# Altium PCB TMC2160.PcbDoc
Units mm, origin at the board's own origin, x right, y up, seen from the top; angles counter-clockwise.
Board outline 65 x 40 mm, 4 copper layers (Top Layer, Layer 1, Layer 2, Bottom Layer), stack 1.52 mm thick; 52 components, 55 nets, 207 pads, 154 vias.
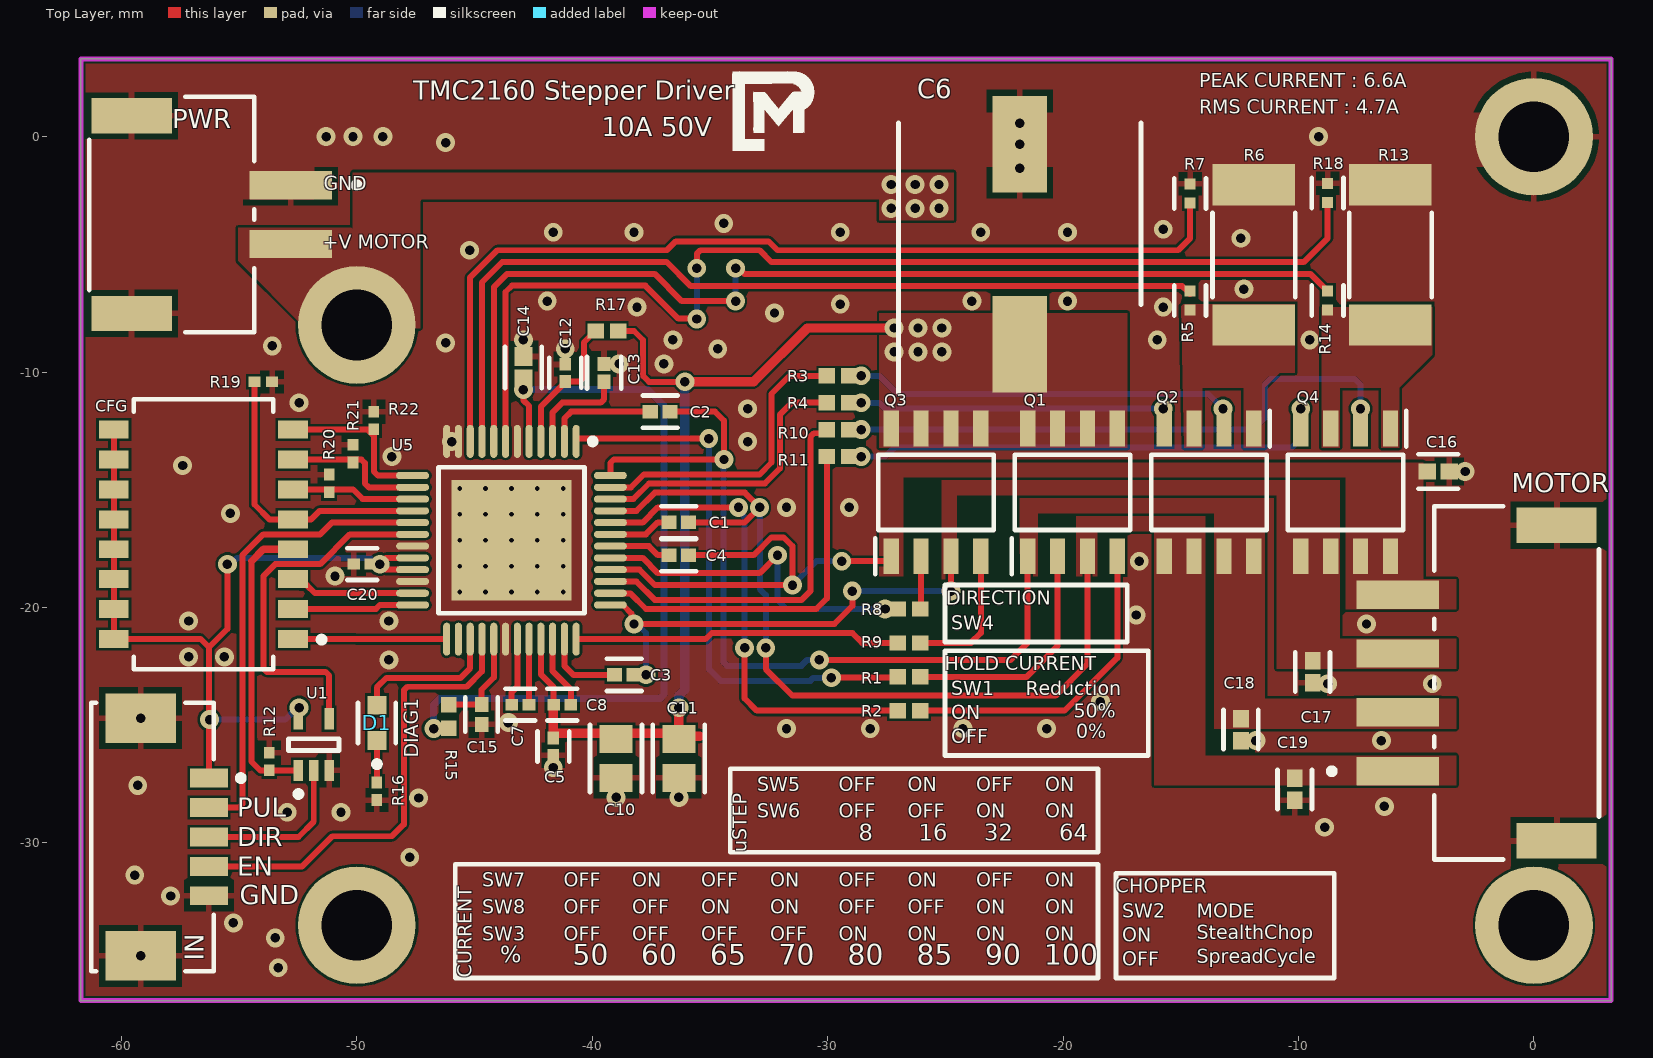
[diagram p0: Top Layer view]
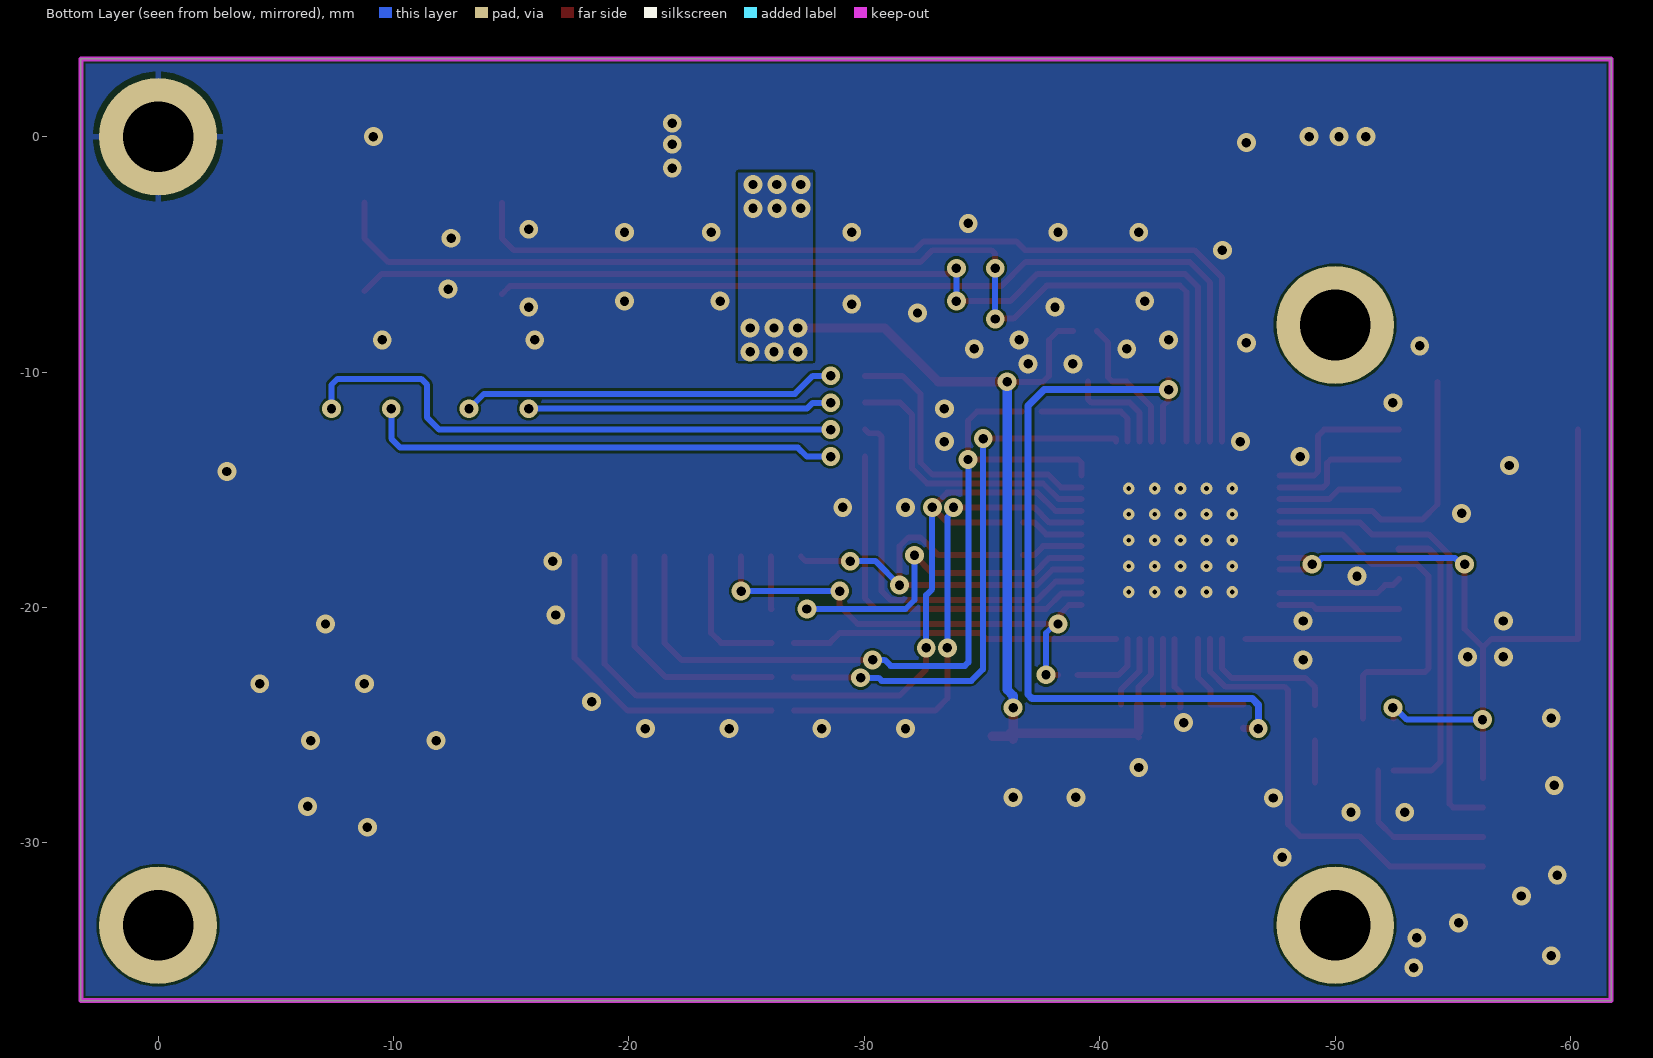
[diagram p1: Bottom Layer view, seen from below]
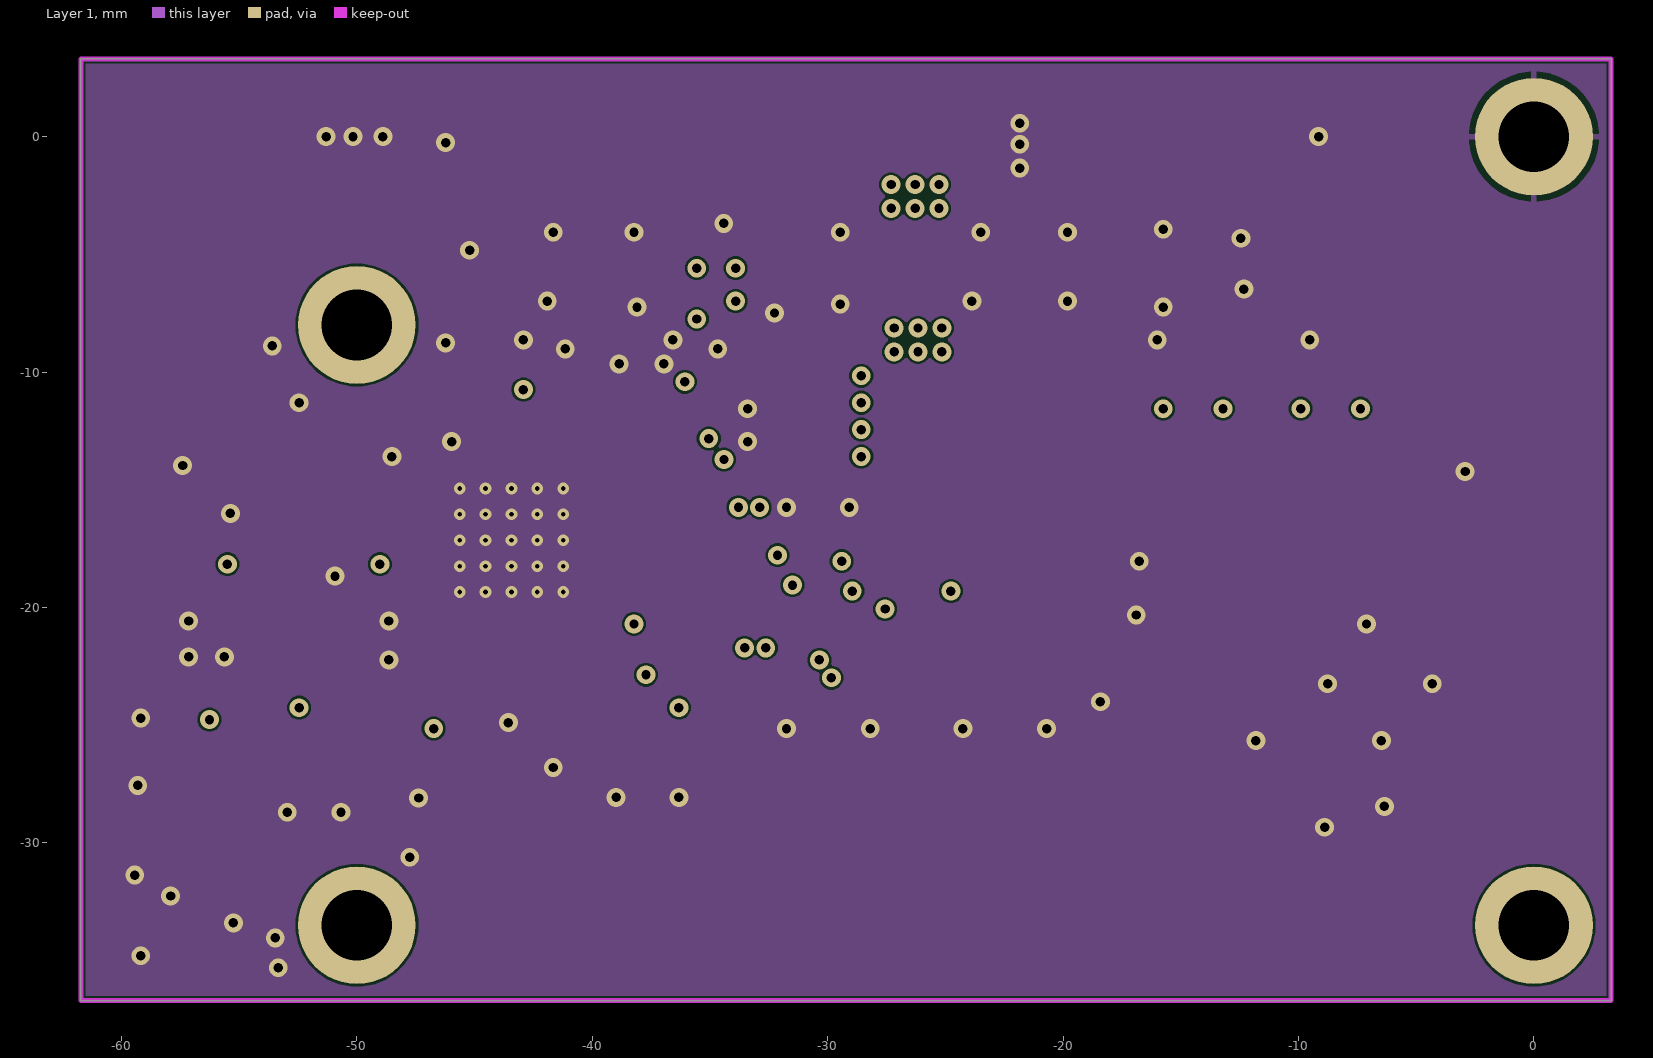
[diagram p2: Layer 1]
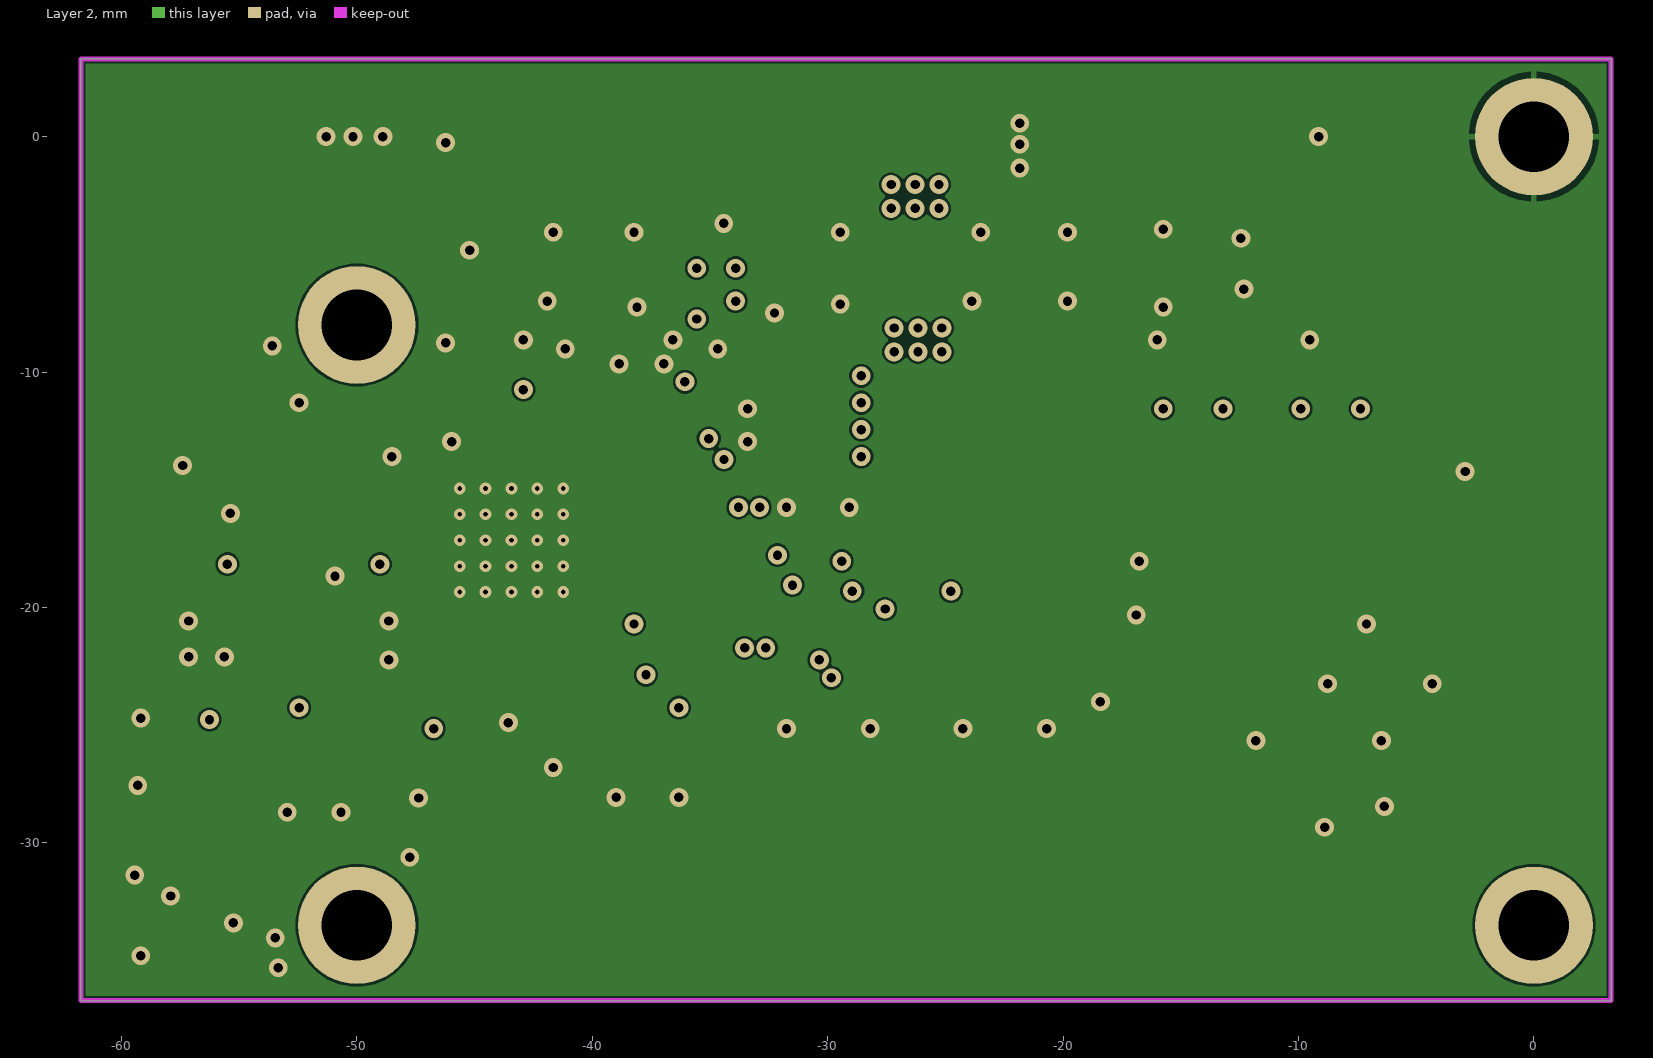
[diagram p3: Layer 2]
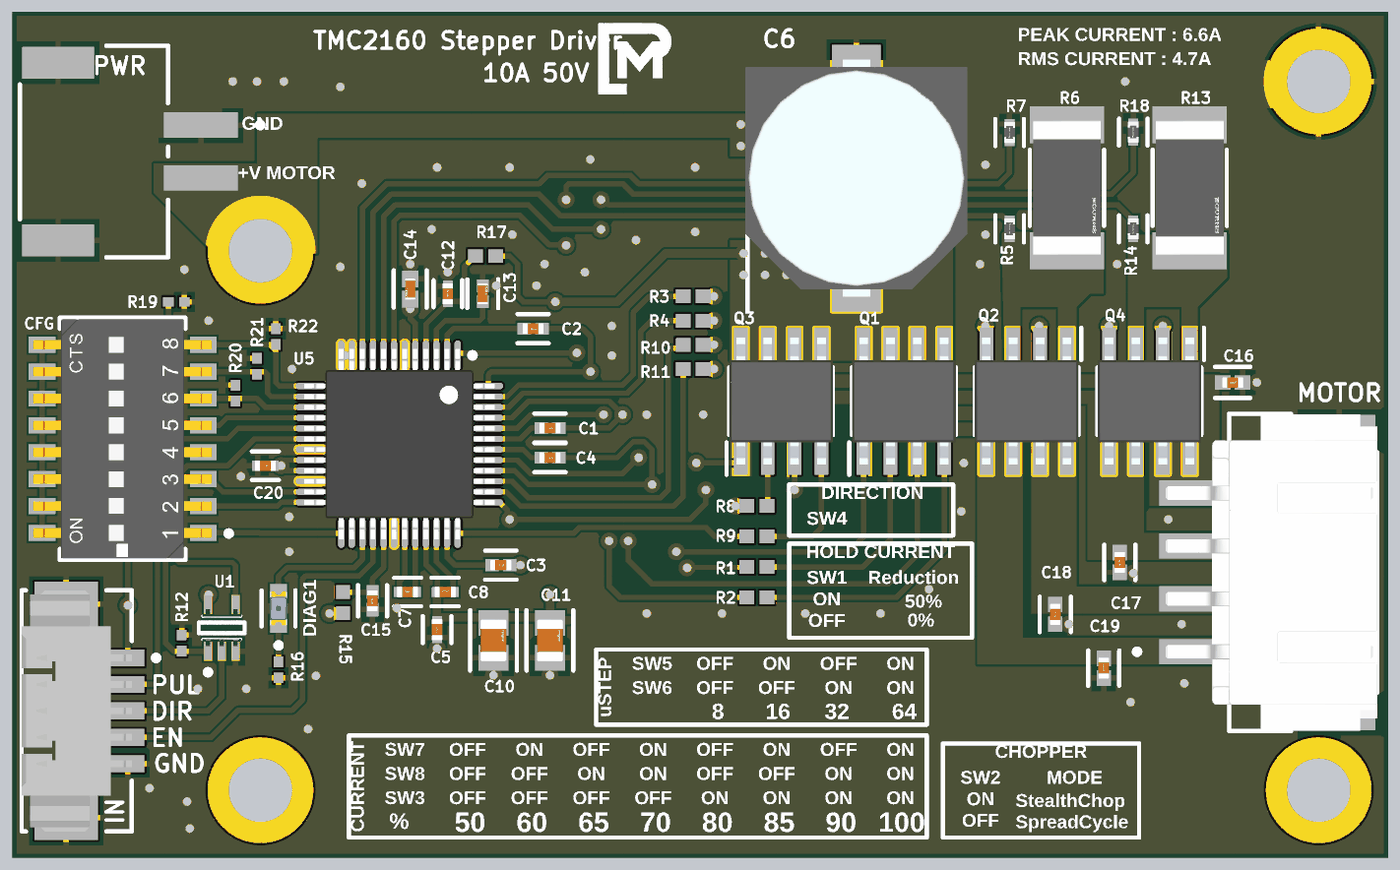
[diagram p4: 3D render of the assembled board from above, using the file's embedded part models]

## Layer stack, top to bottom
Top Solder: solder mask 0.01, Solder Resist, Dk 3.5
Top Layer: signal copper 0.035
Dielectric 2: prepreg 0.09, PP-006, Dk 4.1
Layer 1: signal copper 0.035
Dielectric 1: dielectric 1.2, FR-4, Dk 4.8
Layer 2: signal copper 0.035
Dielectric 3: prepreg 0.09, PP-006, Dk 4.1
Bottom Layer: signal copper 0.035
Bottom Solder: solder mask 0.01, Solder Resist, Dk 3.5

## Board outline
-61.722,-36.698 -61.722,3.302 3.278,3.302 3.278,-36.698

## Design rules (kind name [scope] priority, off if disabled: settings)
Clearance [All] p1: gap=0.1 ignorepadtopadclearanceinfootprint=FALSE
PolygonConnect PolygonConnect_1 [All vs IsNamedPolygon('P_BMA1') Or IsNamedPolygon('P_BMA2') Or IsNamedPolygon('P_BMB1') Or IsNamedPolygon('P_BMB2') Or IsNamedPolygon('P_GND_POWER') Or IsNamedPolygon('P_RES1') Or IsNamedPolygon('P_RES2') Or IsNamedPolygon('P_VM_TOP') Or IsNamedPolygon('P_VM_TOP_1') Or IsNamedPolygon('P_VM_BOTTOM')] p1: connectstyle=Direct reliefconductorwidth=0.254 reliefentries=4 polygonreliefangle="90 Angle" airgapwidth=0.254
PolygonConnect PolygonConnect_3 [(HasFootprint('FP-CRA2512-IPC_A') OR HasFootprint('TSQFP-48'))] p2: connectstyle=Direct reliefconductorwidth=0.254 reliefentries=4 polygonreliefangle="90 Angle" airgapwidth=0.254
PolygonConnect PolygonConnect_2 [isVia] p3: connectstyle=Direct reliefconductorwidth=0.254 reliefentries=4 polygonreliefangle="90 Angle" airgapwidth=0.254
PolygonConnect [All] p4: connectstyle=Relief reliefconductorwidth=0.254 reliefentries=4 polygonreliefangle="90 Angle" airgapwidth=0.254
RoutingVias [All] p1: holewidth=0.5 width=1 viastyle="Through Hole" minholewidth=0.4 minwidth=0.8 maxholewidth=0.5 maxwidth=1
SilkToSilkClearance [All] p1: silktosilkclearance=0.1
SolderMaskExpansion [All] p1: expansion=0.102 istentingtop=FALSE
Width [All] p1: maxlimit=2 minlimit=0.2 preferedwidth=0.3
29 further rules are at their usual default settings.

## Components (designator, comment, footprint, x,y, rotation, side; value= is the part's Value field where it differs from the comment)
C1 "C1005X5R1V474K050BC" FP-C1005-050-0_05-IPC_B -36.322,-16.383 r180 top value=470nF
C2 "C1005X5R1V474K050BC" FP-C1005-050-0_05-IPC_B -37.12,-11.684 r180 top value=470nF
C3 "C1005X5R1V474K050BC" FP-C1005-050-0_05-IPC_B -38.644,-22.86 r180 top value=470nF
C4 "C1005X5R1V474K050BC" FP-C1005-050-0_05-IPC_B -36.322,-17.78 r180 top value=470nF
C5 "C1005X7R1H104K050BB" FP-C1005-050-0_05-IPC_C -41.656,-25.908 r270 top value=100nF
C6 "VZH221M1HTR-1010L" CAPAE1030X1050N -21.844,-4.572 r90 top value=220u
C7 "C1005X7R1H223K050BB" FP-C1005-050-0_05-IPC_C -43.053,-24.13 r0 top value=22nF
C8 "C1005X7R1H104K050BB" FP-C1005-050-0_05-IPC_C -41.275,-24.13 r0 top value=100nF
C10 "GRM21BR61H475KE51L" FP-GRM21B-0_15-IPC_B -38.989,-26.416 r90 top value=4.7uF
C11 "GRM21BR61H475KE51L" FP-GRM21B-0_15-IPC_B -36.322,-26.416 r90 top value=4.7uF
C12 "C1005X7R1H104K050BB" FP-C1005-050-0_05-IPC_C -41.148,-10.033 r270 top value=100nF
C13 "C1005X5R1V225K050BC" FP-C1005-050-0_15-IPC_C -39.497,-10.033 r90 top value=2.2uF
C14 "C1005X5R1V225K050BC" FP-C1005-050-0_15-IPC_A -42.926,-9.81 r270 top value=2.2uF
C15 "C1005X5R1V474K050BC" FP-C1005-050-0_05-IPC_B -44.704,-24.547 r90 top value=470nF
C16 "C1005X7R1H102K050BA" FP-C1005-050-0_05-IPC_A -4.064,-14.224 r180 top value=1nF
C17 "C1005X7R1H102K050BA" FP-C1005-050-0_05-IPC_A -9.398,-22.733 r90 top value=1nF
C18 "C1005X7R1H102K050BA" FP-C1005-050-0_05-IPC_A -12.446,-25.187 r90 top value=1nF
C19 "C1005X7R1H102K050BA" FP-C1005-050-0_05-IPC_A -10.16,-27.727 r90 top value=1nF
C20 "C1005X7R1H104K050BB" FP-C1005-050-0_05-IPC_C -49.77,-18.161 r0 top value=100nF
CFG "218-8LPST" FP-218-8LPST-MFG -56.515,-16.891 r180 top
D1 "LTST-C191TBKT" FP-LTST-C191TBKT-MFG -49.149,-24.904 r90 top value=Blue
IN "53261-0571" MOLX-52361-0571-5_V -56.282,-29.748 r270 top
MOTOR "SHOU HAN 2.54-4P WT" A2501WF-04A -0.734,-23.206 r90 top
PWR "SHOU HAN 2.54-2P WT" A2501WF-02A -56.188,-3.311 r270 top
Q1 "CSD88537ND" SOIC127P600X175-8N -19.599,-15.113 r90 top
Q2 "CSD88537ND" SOIC127P600X175-8N -13.802,-15.113 r270 top
Q3 "CSD88537ND" SOIC127P600X175-8N -25.4,-15.113 r90 top
Q4 "CSD88537ND" SOIC127P600X175-8N -8.001,-15.113 r270 top
R1 "RC0402FR-0710RL" RESC1005X40X25ML05T10 -26.543,-22.945 r180 top value=10
R2 "RC0402FR-0710RL" RESC1005X40X25ML05T10 -26.543,-24.384 r0 top value=10
R3 "RC0402FR-0710RL" RESC1005X40X25ML05T10 -29.558,-10.16 r180 top value=10
R4 "RC0402FR-0710RL" RESC1005X40X25ML05T10 -29.558,-11.303 r0 top value=10
R5 "ERJ-2RKF47R0X" FP-ERJ2RK-IPC_C -14.605,-6.964 r270 top value=47R
R6 "CRA2512-FZ-R050ELF" FP-CRA2512-IPC_A -11.897,-5.026 r270 top value=0R050
R7 "ERJ-2RKF47R0X" FP-ERJ2RK-IPC_C -14.605,-2.413 r90 top value=47R
R8 "RC0402FR-0710RL" RESC1005X40X25ML05T10 -26.543,-20.066 r180 top value=10
R9 "RC0402FR-0710RL" RESC1005X40X25ML05T10 -26.543,-21.505 r0 top value=10
R10 "RC0402FR-0710RL" RESC1005X40X25ML05T10 -29.558,-12.446 r180 top value=10
R11 "RC0402FR-0710RL" RESC1005X40X25ML05T10 -29.558,-13.589 r0 top value=10
R12 "RC0402FR-0710KL" RESC1005X40X25LL05T10 -53.721,-26.543 r270 top value=10K
R13 "CRA2512-FZ-R050ELF" FP-CRA2512-IPC_A -6.096,-5.026 r270 top
R14 "ERJ-2RKF47R0X" FP-ERJ2RK-IPC_C -8.763,-6.964 r270 top value=47R
R15 "ERJ-2GEJ2R2X" RESC1005X40X25ML05T05 -46.101,-24.63 r270 top
R16 "RC0402FR-07330RL" RESC1005X40X25LL05T10 -49.149,-27.807 r90 top value=330
R17 "RC0402FR-0710RL" RESC1005X40X25ML05T10 -39.37,-8.255 r180 top value=10
R18 "ERJ-2RKF47R0X" FP-ERJ2RK-IPC_C -8.763,-2.392 r90 top value=47R
R19 "RC0402FR-0710KL" RESC1005X40X25LL05T10 -53.975,-10.414 r180 top value=10K
R20 "RC0402FR-0710KL" RESC1005X40X25LL05T10 -51.181,-14.732 r270 top value=10K
R21 "RC0402FR-0710KL" RESC1005X40X25LL05T10 -50.165,-13.462 r270 top value=10K
R22 "RC0402FR-0710KL" RESC1005X40X25LL05T10 -49.276,-12.059 r270 top value=10K
U1 "SN74LVC1G86DCKR" FP-DCK0005A-MFG -51.831,-25.824 r90 top
U5 "TMC2160" TSQFP-48 -43.434,-17.145 r270 top

## Footprints (in the part's own frame and the unit in brackets; to place one, negate y for a bottom-side part, rotate by r counter-clockwise, add the part's x,y. Pads: shape width x height; smd on the part's side, far side on the other; paste and mask are expansions set on the pad)
A2501WF-02A [mm]
  rect 1.2x3.5 smd paste+0 mask+0: 1(-1.25,3.375) 2(1.25,3.375)
  rect 1.5x3.4 smd paste+0 mask+0: 3(-4.2,-3.375) 4(4.2,-3.375)
  silkscreen extent -5,-5.18 5,6.3
A2501WF-04A [mm]
  rect 1.2x3.5 smd paste+0 mask+0: 1(-3.75,5.05) 2(-1.25,5.05) 3(1.25,5.05) 4(3.75,5.05)
  rect 1.5x3.4 smd paste+0 mask+0: 5(-6.7,-1.7) 6(6.7,-1.7)
  silkscreen extent -7.5,-3.5 7.5,7.97, body extent -7.95,-3.8 7.95,7.4, height 0.25
CAPAE1030X1050N [mm]
  rect 4.1x2.3 smd: 1(-4.25,0) 2(4.25,0)
  silkscreen extent -6.3,-5.15 5.15,5.15, body extent -5.6,-5.25 5.6,5.25, height 10.5
FP-218-8LPST-MFG [mm]
  rect 1.27x0.76 smd paste+0 mask+0: 1(-3.81,4.445) 2(-3.81,3.175) 3(-3.81,1.905) 4(-3.81,0.635) 5(-3.81,-0.635) 6(-3.81,-1.905) 7(-3.81,-3.175) 8(-3.81,-4.445) 9(3.81,-4.445) 10(3.81,-3.175) 11(3.81,-1.905) 12(3.81,-0.635) 13(3.81,0.635) 14(3.81,1.905) 15(3.81,3.175) 16(3.81,4.445)
  silkscreen extent -5.14,-5.73 2.97,5.73, body extent -4.54,-5.83 4.54,5.83, height 0.25
FP-C1005-050-0_05-IPC_A [mm]
  rect 0.739x0.672 smd paste+0 mask+0: 1(-0.467,0) 2(0.467,0)
  silkscreen extent -0.84,-0.74 0.84,0.74, body extent -0.5,-0.25 0.5,0.25, height 0.55
FP-C1005-050-0_05-IPC_B [mm]
  rect 0.639x0.572 smd paste+0 mask+0: 1(-0.417,0) 2(0.417,0)
  silkscreen extent -0.74,-0.69 0.74,0.69, body extent -0.89,-0.44 0.89,0.44, height 0.25
FP-C1005-050-0_05-IPC_C [mm]
  rect 0.539x0.472 smd paste+0 mask+0: 1(-0.367,0) 2(0.367,0)
  silkscreen extent -0.64,-0.67 0.64,0.67, body extent -0.74,-0.38 0.74,0.38, height 0.25
FP-C1005-050-0_15-IPC_A [mm]
  rect 0.805x0.76 smd paste+0 mask+0: 1(-0.477,0) 2(0.477,0)
  silkscreen extent -0.88,-0.78 0.88,0.78, body extent -1.08,-0.58 1.08,0.58, height 0.25
FP-C1005-050-0_15-IPC_C [mm]
  rect 0.605x0.56 smd paste+0 mask+0: 1(-0.377,0) 2(0.377,0)
  silkscreen extent -0.68,-0.72 0.68,0.72, body extent -0.78,-0.43 0.78,0.43, height 0.25
FP-CRA2512-IPC_A [mm]
  rect 1.756x3.506 smd paste+0 mask+0: 1(-2.975,0) 2(2.975,0)
  silkscreen extent -1.8,-1.75 1.8,1.75, body extent -4.35,-2.25 4.35,2.25, height 0.25
FP-DCK0005A-MFG [mm]
  rect 0.9x0.4 smd paste-1000 mask+0: 1(-1.1,0.65) 2(-1.1,0) 3(-1.1,-0.65) 4(1.1,-0.65) 5(1.1,0.65)
  silkscreen extent -2.22,-1.07 0.25,1.07, body extent -1.65,-1.33 1.65,1.33, height 0.25
FP-ERJ2RK-IPC_C [mm]
  rect 0.468x0.472 smd paste+0 mask+0: 1(-0.402,0) 2(0.402,0)
  silkscreen extent -0.64,-0.67 0.64,0.67, body extent -0.74,-0.38 0.74,0.38, height 0.25
FP-GRM21B-0_15-IPC_B [mm]
  rect 1.206x1.408 smd paste+0 mask+0: 1(-0.826,0) 2(0.826,0)
  silkscreen extent -1.43,-1.1 1.43,1.1, body extent -1.68,-0.95 1.68,0.95, height 0.25
FP-LTST-C191TBKT-MFG [mm]
  rect 0.8x0.8 smd paste+0 mask+0: 1(-0.75,0) 2(0.75,0)
  silkscreen extent -1.87,-0.8 0.85,0.8, body extent -1.25,-0.55 1.25,0.55, height 0.25
MOLX-52361-0571-5_V [mm] "SMD, 5-Leads, Body 11.4x5.2mm, Pitch 1.25mm"
  rect 0.8x1.6 smd: 1(-2.5,0) 2(-1.25,0) 3(0,0) 4(1.25,0) 5(2.5,0)
  rect 2.1x3 smd: MP1(-5.05,-2.9) MP2(5.05,-2.9)
  silkscreen extent -5.7,-5 5.7,1.48, body extent -5.7,-5 5.7,0.2, height 3.4
RESC1005X40X25LL05T10 [mm] "Chip Resistor, 2-Leads, Body 1.00x0.50mm, IPC High Density"
  rect 0.5x0.45 smd: 1(-0.375,0) 2(0.375,0)
  body extent -0.53,-0.27 0.53,0.28, height 0.4
RESC1005X40X25ML05T05 [mm] "Chip Resistor, 2-Leads, Body 1.00x0.50mm, IPC Low Density"
  rect 0.65x0.65 smd: 1(-0.5,0) 2(0.5,0)
  body extent -0.53,-0.27 0.53,0.28, height 0.4
RESC1005X40X25ML05T10 [mm] "Chip Resistor, 2-Leads, Body 1.00x0.50mm, IPC Low Density"
  rect 0.7x0.65 smd: 1(-0.475,0) 2(0.475,0)
  body extent -0.53,-0.27 0.53,0.28, height 0.4
SOIC127P600X175-8N [mm]
  rect 1.525x0.65 smd: 1(-2.712,1.905) 2(-2.712,0.635) 3(-2.712,-0.635) 4(-2.712,-1.905) 5(2.712,-1.905) 6(2.712,-0.635) 7(2.712,0.635) 8(2.712,1.905)
  silkscreen extent -3.47,-2.45 1.6,2.58, body extent -3,-2.45 3,2.45, height 1.75
TSQFP-48 [mm] "TSQFP, 48-Leads, Body 7.00x7.00mm, Pitch 0.50mm, Thermal Pad 5.10x5.10mm, IPC Medium Density"
  oval 1.4x0.3 smd: 1(-4.2,2.75) 2(-4.2,2.25) 3(-4.2,1.75) 4(-4.2,1.25) 5(-4.2,0.75) 6(-4.2,0.25) 7(-4.2,-0.25) 8(-4.2,-0.75) 9(-4.2,-1.25) 10(-4.2,-1.75) 11(-4.2,-2.25) 12(-4.2,-2.75) 25(4.2,-2.75) 26(4.2,-2.25) 27(4.2,-1.75) 28(4.2,-1.25) 29(4.2,-0.75) 30(4.2,-0.25) 31(4.2,0.25) 32(4.2,0.75) 33(4.2,1.25) 34(4.2,1.75) 35(4.2,2.25) 36(4.2,2.75)
  oval 0.3x1.4 smd: 13(-2.75,-4.2) 14(-2.25,-4.2) 15(-1.75,-4.2) 16(-1.25,-4.2) 17(-0.75,-4.2) 18(-0.25,-4.2) 19(0.25,-4.2) 20(0.75,-4.2) 21(1.25,-4.2) 22(1.75,-4.2) 23(2.25,-4.2) 24(2.75,-4.2) 37(2.75,4.2) 38(2.25,4.2) 39(1.75,4.2) 40(1.25,4.2) 41(0.75,4.2) 42(0.25,4.2) 43(-0.25,4.2) 44(-0.75,4.2) 45(-1.25,4.2) 46(-1.75,4.2) 47(-2.25,4.2) 48(-2.75,4.2)
  rect 5.1x5.1 smd: 49(0,0)
  silkscreen extent -4.32,-3.1 3.1,3.57, body extent -4.5,-4.5 4.5,4.5, height 1.2

## Part data
C1 C2 C3 C4 C15: library part CMP-08246-003870-1, "Multilayer Ceramic Capacitors 470nF ±10% 35V X5R SMD 0402", Case Code (Imperial)=0402, Case Code (Metric)=1005, Dielectric=X5R, Dielectric Material=Ceramic, Max Operating Temperature=85°C, Min Operating Temperature=-55°C, Package Quantity=10000, Tolerance=10%, Voltage Rating=35V, Case/Package=0402, Height=0.5mm, Lead Free="Lead Free", Length=0.039inch, Mount="Surface Mount", Packaging="Tape and Reel", RoHS Compliant=Yes, Series=C, Termination=SMD/SMT, Thickness=0.022inch, Voltage Rating (DC)=35V, Weight=2.3E-05oz, Width=0.02inch
C5 C8 C12 C20: library part CMP-2000-05393-2, "Multilayer Ceramic Capacitors 100nF ±10% 50V X7R SMD 0402", Case Code (Imperial)=0402, Case Code (Metric)=1005, Dielectric=X7R, Dielectric Material=Ceramic, Max Operating Temperature=125°C, Min Operating Temperature=-55°C, Package Quantity=1, Tolerance=10%, Voltage=50V, Case/Package=0402, Construction=Flat, Depth=0.5mm, Height=0.5mm, Lead Free="Lead Free", Length=1mm, Mount="Surface Mount", Packaging="Tape and Reel", Radiation Hardening=No, REACH SVHC="No SVHC", Resistor Type=Ceramic, RoHS Compliant=Yes, Series=C, Termination=SMD/SMT, Thickness=0.022inch, Voltage Rating=50V, Voltage Rating (DC)=50V, Weight=2.3E-05oz, Width=0.02inch
C6: "Capacitor Polarised", Manufacturer_Name=Lelon, Datasheet Link=https://www.mouser.co.uk/datasheet/2/231/151002387394-1222329.pdf, Height=10.5mm, Manufacturer_Part_Number=VZH221M1HTR-1010L
C7: library part CMP-08246-004483-1, "Multilayer Ceramic Capacitors 22nF ±10% 50V X7R SMD 0402", Case Code (Imperial)=0402, Case Code (Metric)=1005, Dielectric=X7R, Dielectric Material=Ceramic, Max Operating Temperature=125°C, Min Operating Temperature=-55°C, Package Quantity=1, Tolerance=10%, Voltage Rating=50V, Case/Package=0402, Construction=Flat, Depth=0.5mm, Height=0.5mm, Lead Free="Lead Free", Length=1mm, Mount="Surface Mount", Number of Pins=2, Packaging="Tape and Reel", Radiation Hardening=No, REACH SVHC="No SVHC", Resistor Type=Ceramic, RoHS Compliant=Yes, Series=C, Termination=SMD/SMT, Thickness=0.022inch, Voltage Rating (DC)=50V, Weight=2.3E-05oz, Width=0.02inch
C10 C11: library part CMP-06035-059131-1, "Chip Multilayer Ceramic Capacitors for General Purpose, 0805, 4.7uF, X5R, 15%, 10%, 50V", Case Code (Imperial)=0805, Case Code (Metric)=2012, Dielectric=X5R, Max Operating Temperature=85°C, Min Operating Temperature=-55°C, Tolerance=10%, Voltage Rating=50V, Case/Package=0805, Depth=1.25mm, Height=1.25mm, Lead Free="Lead Free", Length=2mm, Material=Ceramic, Mount="Surface Mount", Packaging="Tape and Reel", REACH SVHC="No SVHC", Thickness=0.055inch, Voltage Rating (DC)=50V, Width=0.049inch
C13 C14: library part CMP-08246-007153-1, "CAP CER 2.2UF 35V X5R 0402", Case Code (Imperial)=0402, Case Code (Metric)=1005, Dielectric=X5R, Dielectric Material=Ceramic, Max Operating Temperature=85°C, Min Operating Temperature=-55°C, Package Quantity=1, Tolerance=10%, Voltage Rating=35V, Case/Package=0402, Depth=0.5mm, Height=0.5mm, Lead Free="Lead Free", Length=1mm, Mount="Surface Mount", Packaging="Tape and Reel", REACH SVHC="No SVHC", Resistor Type=Ceramic, RoHS Compliant=Yes, Series=C, Termination=SMD/SMT, Thickness=0.022inch, Voltage Rating (DC)=35V, Weight=2.3E-05oz, Width=0.5mm
C16 C17 C18 C19: library part CMP-08246-005438-1, "Multilayer Ceramic Capacitors 1nF ±10% 50V X7R SMD 0402", Case Code (Imperial)=0402, Case Code (Metric)=1005, Dielectric=X7R, Dielectric Material=Ceramic, Max Operating Temperature=125°C, Min Operating Temperature=-55°C, Package Quantity=1, Tolerance=10%, Voltage=50V, Case/Package=0402, Construction=Flat, Depth=0.5mm, Height=0.5mm, Lead Free="Lead Free", Length=1mm, Mount="Surface Mount", Packaging="Tape and Reel", Radiation Hardening=No, REACH SVHC="No SVHC", Resistor Type=Ceramic, RoHS Compliant=Yes, Series=C, Termination=SMD/SMT, Thickness=0.022inch, Voltage Rating=50V, Voltage Rating (DC)=50V, Weight=2.3E-05oz, Width=0.02inch
CFG: library part CMP-07018-000007-1, "SWITCH SLIDE DIP SPST 25MA 24V", Contact Resistance=100mR, Current Rating=25mA, Max Operating Temperature=85°C, Max Voltage Rating (DC)=24V, Min Operating Temperature=-55°C, Package Quantity=40, Actuator Type="Slide (Standard)", Contact Material=Copper, Contact Plating=Gold, Depth=8.44mm, Electrical Life=1000Cycles, Height=2.65mm, Lead Free="Lead Free", Length=0.446inch, Max Current Rating=25mA, Mount="Surface Mount", Number of Positions=8, Orientation=Straight, Packaging=Rail/Tube, Pitch=0.05inch, Radiation Hardening=No, RoHS Compliant=Yes, Series=218, Terminal Pitch=1.27mm, Termination="Gull Wing", Throw Configuration=SPST, Voltage Rating (DC)=24V, Washable=Yes
D1: library part CMP-22017-000008-1, "LED BLUE CLEAR CHIP SMD", Case Code (Imperial)=0603, Case Code (Metric)=1608, Color=Blue, Forward Current=20mA, Forward Voltage=3.8V, Lens Color=Colorless, Max Operating Temperature=80°C, Max Power Dissipation=75mW, Min Operating Temperature=-20°C, Package Quantity=1, Power Dissipation=76mW, Reverse Voltage=5V, Case/Package=0603, Depth=1.6mm, Dominant Wavelength=475nm, Height=0.55mm, Illumination Color=Blue, Lead Free="Lead Free", Length=0.8mm, Lens Style=Diffused, Lens Transparency=Clear, Luminous Intensity=180mcd, Mount="Surface Mount", Number of Elements=1, Number of LEDs=1, Number of Pins=2, Packaging="Tape and Reel", Radiation Hardening=No, Test Current=20mA, Viewing Angle=130°, Wavelength=468nm, Width=0.8mm
IN: library part CMP-2000-05249-1, "Male Header, Pitch 1.25 mm, 1 x 5 Position, Height 3.4 mm, RoHS, Tape and Reel", Current Rating=1A, Manufacturer=Molex, Voltage Rating=125V, Brand=Molex, Contact Material=PhosphorBronze, Contact Plating=Tin, Datasheet URL=http://datasheet.octopart.com/532610571-Molex-datasheet-8343080.pdf, Datasheet Version="Rev. D, 04/2004", Factory Pack Quantity=1000, Housing Material=Thermoplastic, Manufacturer URL=http://www.molex.com/, Mounting Angle=Right, Mounting Style=SMD/SMT, Number of Positions=5, Number of Positions / Contacts=5, Number of Rows=1, Packaging=Reel, Pitch=1.25mm, Product Category=Headers&WireHousings, Product Type=Headers, RoHS=Details, Series=53261, Termination Style=SMD, Tradename=PicoBlade, Type=Shrouded
MOTOR: library part CMP-17439-000072-1, "CONN HEADER SMD R/A 4POS 2.5MM", Color=Natural, Contact Resistance=20mR, Housing Color=Beige, Max Current Rating=3A, Max Operating Temperature=85°C, Max Voltage Rating (AC)=250V, Min Operating Temperature=-25°C, Package Quantity=1, Connector Type="Male Pin", Contact Material="Copper Alloy", Contact Plating=Tin, Contact Type="Male Pin", Depth=10mm, Gender=Male, Housing Material=Polyamide, Lead Free="Lead Free", Length=15mm, Mount="Surface Mount", Number Of Contacts=4, Number of Positions=4, Number of Rows=1, Orientation="Right Angle", Packaging="Tape and Reel", Pitch=0.098inch, REACH SVHC="No SVHC", Series=XH, Termination=Solder
PWR: library part 1778764, "Connector", Manufacturer_Name="Phoenix Contact", Mouser Part Number=651-1778764, Arrow Part Number=1778764, Arrow Price/Stock=https://www.arrow.com/en/products/1778764/phoenix-contact?utm_currency=USD&region=nac, Datasheet Link=http://www.phoenixcontact.com/de/produkte/1778764/pdf, Height=5.1mm, Manufacturer_Part_Number=1778764, Mouser Price/Stock=https://www.mouser.co.uk/ProductDetail/Phoenix-Contact/1778764?qs=i0qWf6NAoDsxsSJGIXIgDA%3D%3D
Q1 Q2 Q3 Q4: "MOSFET (N-Channel)", Manufacturer_Name="Texas Instruments", Mouser Part Number=595-CSD88537ND, Arrow Part Number=CSD88537ND, Arrow Price/Stock=https://www.arrow.com/en/products/csd88537nd/texas-instruments?region=nac, Datasheet Link=http://www.ti.com/lit/gpn/csd88537nd, Height=1.75mm, Manufacturer_Part_Number=CSD88537ND, Mouser Price/Stock=https://www.mouser.co.uk/ProductDetail/Texas-Instruments/CSD88537ND?qs=7wMBv%2Ftbz9KkQ3rfcHocDA%3D%3D
R1 R2 R3 R4 R8 R9 R10 R11 R17: library part CMP-2002-07344-1, Manufacturer="Yageo / Phycomp", Part Number=RC0402FR-07100RL
R5 R7 R14 R18: library part CMP-1011-00360-3, "RES SMD 47 OHM 1% 1/10W 0402", Case Code (Imperial)=0402, Case Code (Metric)=1005, Max Operating Temperature=155°C, Max Power Dissipation=100mW, Min Operating Temperature=-55°C, Package Quantity=1, Resistance Tolerance=1%, Resistor Type="Thick Film", Temperature Coefficient=100ppm/°C, Voltage Rating=50V, Case/Package=0402, Construction=Rectangular, Contact Plating=Tin, Depth=0.5mm, Features="Automotive AEC-Q200", Height=0.35mm, Lead Free="Lead Free", Length=1mm, Military Standard=Not, Mount="Surface Mount", Number of Pins=2, Number of Terminations=2, Packaging="Tape and Reel", Power Rating=100mW, REACH SVHC="No SVHC", RoHS Compliant=Yes, Series=ERJ, Technology="THICK FILM", Termination=SMD/SMT, Tolerance=1%, Voltage Rating (DC)=50V, Weight=2.8E-05oz, Width=0.02inch
R6 R13: library part CMP-07231-007405-1, "RES 0.05 OHM 1% 3W 2512"
R12 R19 R20 R21 R22: library part CMP-2002-07353-1, Manufacturer="Yageo / Phycomp", Part Number=RC0402FR-0710KL
R15: library part CMP-1011-00010-2, Manufacturer=Panasonic, Resistance=2.2, Part Number=ERJ-2GEJ2R2X
R16: library part CMP-2002-07613-1, Manufacturer="Yageo / Phycomp", Part Number=RC0402FR-07330RL
U1: library part CMP-0859-00438-4, "IC GATE XOR 1CH 2-INP SC70-5", Ambient Temperature Range High=+125°C, Ambient Temperature Range Low=-40°C, Manufacturer="Texas Instruments", Max Junction Temp=+150°C, Max Supply Voltage=5.5V, Min Supply Voltage=1.65V, Nominal Supply Current=15uA, Package=DCK0005A, Temperature="-40°C to +125°C", Automotive=No, Category=IC, ComponentLink2Description=Datasheet, ComponentLink2URL=https://www.ti.com/lit/ds/symlink/sn74lvc1g86.pdf, Device Class L1="Integrated Circuits (ICs)", Device Class L2="Logic ICs", Device Class L3="Logic Gates", Digikey Description="IC GATE XOR 1CH 2-INP SC70-5", Height=1.1mm, Lead Free=Yes, Logic Function Desc=XOR, Manufacturer Part Number=SN74LVC1G86DCKR, Mouser Description="Logic Gates 2 Input", Number of Circuits=1, Number of Inputs=2, Number of Outputs=1, Octopart=https://octopart.com/sn74lvc1g86dckr-texas+instruments-465565, Propagation Delay=5ns, RoHS=TRUE, Standoff Height=0mm, Temperature Range High=+125°C, Temperature Range Low=-40°C

## Free pads (board coordinates)
  round 5 hole 3: 5(-50,-33.5) 5(-50,-8) 5(0,-33.5) 5(0,0)

## Via types
v1: diameter 0.8, hole 0.4, Top Layer to Bottom Layer, tented both sides, 129 vias
v2: diameter 0.5, hole 0.2, Top Layer to Bottom Layer, 25 vias

## Nets (pads, with @x,y where several pads share a name; then routed paths per layer and width w, separated by ;. In a path a pad name is that pad's centre, name@x,y a point inside that pad or via, vN(x,y) a via of type N, cw(c..) or ccw(c..) an arc to the next point about the centre after c; other vN are vias at no path point)
BMA1: C4.1 C16.2 MOTOR.4 Q3.1 Q4.7 Q4.8 U5.40 | length 19.2
  Top Layer w0.254: U5.40 -37.993,-18.395 -37.338,-19.05 v1(-31.496,-19.05) -31.496,-17.399 -31.877,-17.018 -32.385,-17.018 -33.147,-17.78 C4.1 ; v1(-29.406,-18.034) -27.503,-18.034 -27.305,-17.836 Q3.1
  Bottom Layer w0.254: v1(-31.496,-19.05) -30.48,-18.034 v1(-29.406,-18.034)
BMA2: C3.1 C17.2 MOTOR.3 Q3.3 Q4.5 Q4.6 U5.37 | length 20.4
  Top Layer w0.254: U5.37 -38.696,-19.895 -38.331,-20.26 -38.331,-20.597 v1(-38.227,-20.701) -29.718,-20.701 -28.956,-19.939 v1(-28.956,-19.304) ; C3.1 v1(-37.719,-22.86) ; v1(-24.765,-19.304) Q3.3
  Bottom Layer w0.254: v1(-38.227,-20.701) -38.105,-20.701 -37.719,-21.087 v1(-37.719,-22.86) ; v1(-28.956,-19.304) v1(-24.765,-19.304)
BMB1: C2.1 C18.2 MOTOR.2 Q1.1 Q2.7 Q2.8 U5.48 | length 35.2
  Top Layer w0.254: U5.48 -39.234,-13.865 -39.085,-13.716 v1(-34.406,-13.716) -34.406,-12.065 -34.787,-11.684 C2.1 ; v1(-30.353,-22.225) -22.225,-22.225 -21.504,-21.504 Q1.1
  Bottom Layer w0.254: v1(-34.406,-13.716) -34.417,-13.727 -34.417,-22.33 -34.268,-22.479 -31.115,-22.479 -30.861,-22.225 v1(-30.353,-22.225)
BMB2: C1.1 C19.2 MOTOR.1 Q1.3 Q2.5 Q2.6 U5.45 | length 36.4
  Top Layer w0.254: U5.45 -38.12,-15.895 -37.346,-15.121 -33.517,-15.121 v1(-32.89,-15.748) ; C1.1 -33.525,-16.383 -32.893,-15.751 v1@-32.893,-15.748 ; v1(-32.628,-21.717) -32.628,-22.617 -31.496,-23.749 -20.32,-23.749 -18.964,-22.393 Q1.3
  Bottom Layer w0.254: v1(-32.89,-15.748) -32.882,-15.756 -32.882,-19.225 -32.628,-19.479 v1(-32.628,-21.717)
CFG0: CFG.5 R19.2 U5.16 | length 12.3
  Top Layer w0.254: R19.2 -54.35,-15.627 -53.721,-16.256 CFG.5 -51.943,-16.256 -51.582,-15.895 U5.16
CFG1: CFG.6 R20.2 U5.15 | length 5.2
  Top Layer w0.254: CFG.6 -51.562,-14.986 -50.165,-14.986 -49.756,-15.395 U5.15
CFG2: CFG.7 R21.2 U5.14 | length 6.1
  Top Layer w0.254: CFG.7 -50.927,-13.716 -50.673,-13.716 -49.806,-13.716 -49.657,-13.865 -49.657,-14.732 -49.494,-14.895 U5.14
CFG3: CFG.8 R22.2 U5.13 | length 6.8
  Top Layer w0.254: CFG.8 -49.911,-12.446 -49.53,-12.446 -49.276,-12.7 -49.276,-14.224 -49.105,-14.395 U5.13
CFG4: CFG.3 U5.23 | length 5.3
  Top Layer w0.254: CFG.3 -52.452,-19.049 -52.126,-19.049 -51.78,-19.395 U5.23
CFG5: CFG.2 U5.24 | length 5.1
  Top Layer w0.254: CFG.2 -49.193,-20.066 -49.022,-19.895 U5.24
CFG6: CFG.1 U5.25 | length 6.5
  Top Layer w0.254: CFG.1 -50.047,-21.336 -50.038,-21.345 U5.25
DIAG0: U5.26
DIAG1: D1.2 U5.27 | length 6.3
  Top Layer w0.254: D1.2 -49.149,-23.395 -48.741,-22.987 -45.593,-22.987 -45.184,-22.578 U5.27
DIR: U1.4 U5.18 | length 15.8
  Top Layer w0.254: U1.4 -51.181,-22.882 -51.33,-22.733 -53.826,-22.733 -53.975,-22.584 -53.975,-18.669 -53.467,-18.161 -51.562,-18.161 -50.296,-16.895 U5.18
EN: IN.4 U5.28 | length 19.7
  Top Layer w0.254: IN.4 -52.324,-30.998 -51.044,-29.718 -48.514,-29.718 -48.006,-29.21 -48.006,-23.517 -47.857,-23.368 -45.339,-23.368 -44.684,-22.713 U5.28
GND: C5.2 C6.2 C10.1 C11.1 C12.1 C13.2 C14.1 C15.1 C16.1 C17.1 C18.1 C19.1 C20.1 IN.5 IN.MP1 IN.MP2 MOTOR.5 MOTOR.6 pad.5@0,0 PWR.1 PWR.3 PWR.4 R6.1 R7.2 R12.1 R13.1 R16.1 R18.2 R19.1 R20.1 R21.1 R22.1 U1.3 U5.6 U5.11 U5.12 U5.19 U5.22 U5.30 U5.49
  other v1: -53.34,-35.306 -59.182,-34.798 -53.467,-34.036 -55.245,-33.401 -57.912,-32.258 -59.436,-31.369 -47.752,-30.607 -8.89,-29.337 -52.959,-28.702 -50.673,-28.702 -6.35,-28.448 -47.379,-28.092 -38.989,-28.067 -36.322,-28.067 -59.309,-27.559 -41.656,-26.797 -11.811,-25.654 -6.477,-25.654 -31.75,-25.146 -28.194,-25.146 -24.257,-25.146 -20.701,-25.146 -43.561,-24.892 -59.182,-24.698 -18.415,-24.003 -8.763,-23.241 -4.318,-23.241 -48.641,-22.225 -57.15,-22.098 -55.626,-22.098 -7.112,-20.701 -57.15,-20.574 -48.641,-20.574 -16.891,-20.32 -50.927,-18.669 -16.764,-18.034 -55.372,-16.002 -31.75,-15.748 -29.083,-15.748 -2.921,-14.224 -57.404,-13.97 -48.514,-13.589 -45.974,-12.954 -33.401,-12.954 -33.401,-11.557 -52.451,-11.303 -38.862,-9.652 -36.957,-9.652 -41.148,-9.017 -34.671,-9.017 -53.594,-8.89 -46.228,-8.763 -42.926,-8.636 -36.576,-8.636 -16.002,-8.636 -9.525,-8.636 -32.258,-7.493 -38.1,-7.239 -15.748,-7.239 -29.464,-7.112 -41.91,-6.985 -23.876,-6.985 -19.812,-6.985 -12.319,-6.477 -45.212,-4.826 -12.446,-4.318 -41.656,-4.064 -38.227,-4.064 -29.464,-4.064 -23.495,-4.064 -19.812,-4.064 -15.748,-3.937 -34.417,-3.683 -21.844,-1.338 -21.844,-0.322 -46.228,-0.254 -51.308,0 -50.165,0 -48.895,0 -9.144,0 -21.844,0.567
  other v2: -45.634,-19.345 -44.534,-19.345 -43.434,-19.345 -42.334,-19.345 -41.234,-19.345 -45.634,-18.245 -44.534,-18.245 -43.434,-18.245 -42.334,-18.245 -41.234,-18.245 -45.634,-17.145 -44.534,-17.145 -43.434,-17.145 -42.334,-17.145 -41.234,-17.145 -45.634,-16.045 -44.534,-16.045 -43.434,-16.045 -42.334,-16.045 -41.234,-16.045 -45.634,-14.945 -44.534,-14.945 -43.434,-14.945 -42.334,-14.945 -41.234,-14.945
HA1: R8.2 U5.41 | length 14.3
  Top Layer w0.254: U5.41 -37.858,-17.895 -37.211,-18.542 -32.893,-18.542 v1(-32.131,-17.78)
  Bottom Layer w0.254: v1(-32.131,-17.78) -32.131,-19.685 -31.75,-20.066 v1(-27.559,-20.066)
HA2: R9.1 U5.36 | length 14
  Top Layer w0.254: U5.36 -35.188,-21.345 -34.925,-21.082 -28.956,-21.082 -28.533,-21.505 R9.1
HB1: R1.2 U5.1 | length 23.8
  Top Layer w0.254: U5.1 -40.684,-12.848 -40.663,-12.827 v1(-35.052,-12.827) ; v1(-29.845,-22.987) -29.824,-22.966 -27.039,-22.966 R1.2
  Bottom Layer w0.254: v1(-35.052,-12.827) -35.033,-12.846 -35.033,-22.625 -34.544,-23.114 -30.734,-23.114 -30.607,-22.987 v1(-29.845,-22.987)
HB2: R2.1 U5.44 | length 20.7
  Top Layer w0.254: U5.44 -37.858,-16.395 -37.211,-15.748 v1(-33.79,-15.748) ; v1(-33.528,-21.717) -33.528,-23.865 -33.009,-24.384 R2.1
  Bottom Layer w0.254: v1(-33.79,-15.748) -33.79,-15.896 -33.528,-16.158 v1(-33.528,-21.717)
IN_DIR: IN.3 U1.2 | length 6.9
  Top Layer w0.254: IN.3 -52.481,-29.748 -51.831,-29.098 U1.2
LA1: R10.2 U5.39 | length 16.4
  Top Layer w0.254: U5.39 -38.128,-18.895 -37.346,-19.677 -31.107,-19.677 -30.734,-19.304 -30.734,-12.748 -30.585,-12.6 -30.187,-12.6 R10.2
LA2: R11.1 U5.38 | length 15.7
  Top Layer w0.254: U5.38 -39.225,-19.404 -38.381,-19.404 -37.719,-20.066 -30.48,-20.066 -30.033,-19.619 R11.1
LB1: R3.2 U5.47 | length 12.9
  Top Layer w0.254: U5.47 -38.354,-14.895 -37.81,-14.351 -32.893,-14.351 -32.385,-13.843 -32.385,-10.922 -31.623,-10.16 R3.2
LB2: R4.1 U5.46 | length 12.2
  Top Layer w0.254: U5.46 -38.255,-15.395 -37.592,-14.732 -32.666,-14.732 -32.031,-14.097 -32.031,-11.811 -31.523,-11.303 R4.1
NetC1_2: C1.2 U5.43 | length 2.7
  Top Layer w0.254: U5.43 -37.723,-16.895 -37.211,-16.383 C1.2
NetC2_2: C2.2 U5.2 | length 4.7
  Top Layer w0.254: U5.2 -41.184,-11.974 -40.894,-11.684 C2.2
NetC3_2: C3.2 U5.35 | length 3.4
  Top Layer w0.254: U5.35 -41.184,-22.479 -40.803,-22.86 C3.2
NetC4_2: C4.2 U5.42 | length 2.7
  Top Layer w0.254: U5.42 -37.596,-17.395 -37.211,-17.78 C4.2 C4.2@-36.741,-17.782
NetC7_1: C7.1 U5.31 | length 3
  Top Layer w0.254: C7.1@-43.42,-24.257 -43.434,-24.243 -43.434,-23.622 -43.184,-23.372 U5.31
NetC7_2: C7.2 U5.32 | length 2.8
  Top Layer w0.254: C7.2@-42.684,-24.142 U5.32
NetC8_2: C8.2 U5.34 | length 3.1
  Top Layer w0.254: U5.34 -41.684,-22.705 -40.908,-23.481 C8.2
NetC13_1: C13.1 U5.3 | length 4.4
  Top Layer w0.254: U5.3 -41.684,-11.712 -41.275,-11.303 -39.646,-11.303 -39.497,-11.154 C13.1
NetC14_2: C14.2 R15.2 U5.5 | length 32.9
  Top Layer w0.254: C14.2 v1(-42.926,-10.744) -42.926,-11.2 -42.684,-11.442 U5.5
  Top Layer w0.3: v1(-46.736,-25.146) -46.728,-25.138 -46.109,-25.138 R15.2
  Bottom Layer w0.3: v1(-46.736,-25.146) -46.736,-24.13 -46.482,-23.876 -37.133,-23.876 -36.957,-23.7 -36.957,-11.43 -37.643,-10.744 v1(-42.926,-10.744)
NetC15_2: C15.2 R15.1 U5.29 | length 4.4
  Top Layer w0.254: R15.1 C15.2 -44.704,-23.495 -44.184,-22.975 U5.29
NetCFG_4: CFG.4 R12.2 U1.1 | length 12.7
  Top Layer w0.254: -54.483,-18.034 -54.483,-26.543 -54.102,-26.924 -53.721,-26.924 U1.1
  Top Layer w0.3: -54.483,-18.034 -53.975,-17.526 CFG.4
NetD1_1: D1.1 R16.2 | length 1.8
  Top Layer w0.254: R16.2 D1.1
NetQ1_2: Q1.2 R1.1 | length 10.2
  Top Layer w0.254: R1.1 -21.548,-22.945 -20.234,-21.631 Q1.2
NetQ1_4: Q1.4 R2.2 | length 13.6
  Top Layer w0.254: R2.2 -19.939,-24.384 -17.694,-22.139 Q1.4
NetQ2_1: Q2.1 Q2.3 R5.2 R6.2
NetQ2_2: Q2.2 R3.1 | length 15.9
  Bottom Layer w0.254: v1(-28.575,-10.16) -27.813,-10.16 -27.051,-10.922 -13.843,-10.922 v1(-13.208,-11.557)
NetQ2_4: Q2.4 R4.2 | length 12.9
  Bottom Layer w0.254: v1(-28.575,-11.303) -28.556,-11.322 -27.794,-11.322 -27.559,-11.557 v1(-15.748,-11.557)
NetQ3_2: Q3.2 R8.1 | length 2.3
  Top Layer w0.254: R8.1 -26.035,-20.066 Q3.2
NetQ3_4: Q3.4 R9.2 | length 6
  Top Layer w0.254: R9.2 -23.918,-21.505 -23.495,-21.082 Q3.4
NetQ4_1: Q4.1 Q4.3 R13.2 R14.2
NetQ4_2: Q4.2 R10.1 | length 24
  Bottom Layer w0.254: v1(-28.575,-12.446) -11.938,-12.446 -11.43,-11.938 -11.43,-10.541 -11.176,-10.287 -7.62,-10.287 -7.366,-10.541 v1(-7.366,-11.557)
NetQ4_4: Q4.4 R11.2 | length 20.3
  Bottom Layer w0.254: v1(-28.575,-13.589) -27.559,-13.589 -27.178,-13.208 -10.287,-13.208 -9.906,-12.827 v1(-9.906,-11.557)
SRAH: R14.1 U5.8 | length 44.5
  Top Layer w0.254: U5.8 -44.184,-6.393 -43.617,-5.826 -37.354,-5.826 -36.195,-6.985 v1(-33.909,-6.985) ; v1(-33.909,-5.588) -33.782,-5.588 -33.528,-5.842 -9.485,-5.842 -8.765,-6.562 R14.1
  Bottom Layer w0.254: v1(-33.909,-6.985) v1(-33.909,-5.588)
SRAL: R18.1 U5.7 | length 47
  Top Layer w0.254: U5.7 -43.684,-6.6 -43.41,-6.326 -37.743,-6.326 -36.341,-7.728 -35.579,-7.728 v1(-35.56,-7.747) ; v1(-35.56,-5.588) -35.56,-4.975 -35.411,-4.826 -32.893,-4.826 -32.385,-5.334 -9.779,-5.334 -8.763,-4.318 R18.1
  Bottom Layer w0.254: v1(-35.56,-7.747) v1(-35.56,-5.588)
SRBH: R5.1 U5.9 | length 37.8
  Top Layer w0.254: U5.9 -44.684,-6.186 -43.824,-5.326 -36.838,-5.326 -35.814,-6.35 -14.944,-6.35 -14.714,-6.579 -14.714,-6.582 -14.607,-6.689 R5.1@-14.605,-6.689
SRBL: R7.1 U5.10 | length 40.1
  Top Layer w0.254: U5.10 -45.184,-5.979 -44.031,-4.826 -36.83,-4.826 -36.449,-4.445 -32.512,-4.445 -32.131,-4.826 -15.113,-4.826 -14.605,-4.318 R7.1
STEP: IN.2 U5.17 | length 19.9
  Top Layer w0.254: IN.2 -55.013,-28.498 -54.864,-28.349 -54.864,-17.78 -53.975,-16.891 -51.562,-16.891 -51.066,-16.395 U5.17
VCC_IO: C20.2 CFG.9 CFG.10 CFG.11 CFG.12 CFG.13 CFG.14 CFG.15 CFG.16 IN.1 U1.5 U5.20 U5.21 | length 36.7
  Top Layer w0.254: CFG.9 CFG.10 CFG.11 CFG.12 CFG.13 CFG.14 CFG.15 CFG.16 -56.642,-21.336 -56.282,-21.696 ; IN.1 -56.282,-21.696 ; v1(-55.499,-18.161) -55.499,-20.913 -56.282,-21.696 ; U1.5 -52.481,-24.287 v1(-52.451,-24.257) ; U5.21 -48.788,-18.395 v1(-49.022,-18.161) -48.756,-17.895 U5.20
  Bottom Layer w0.254: v1(-56.261,-24.765) -53.047,-24.765 -52.539,-24.257 v1(-52.451,-24.257) ; v1(-55.499,-18.161) -55.351,-18.161 -55.097,-17.907 -49.424,-17.907 -49.17,-18.161 v1(-49.022,-18.161)
VM: C5.1 C6.1 C8.1 C10.2 C11.2 pad.5@-50,-8 PWR.2 Q1.5 Q1.6 Q1.7 Q1.8 Q3.5 Q3.6 Q3.7 Q3.8 R17.1 U5.33 | length 40.3
  Top Layer w0.254: U5.33 -42.184,-22.84 -41.642,-23.382 C8.1 C8.1@-41.634,-24.137 ; C5.1@-41.67,-25.513 C5.1@-41.649,-25.534 ; R17.1@-38.857,-8.255 -38.227,-8.255 -37.846,-8.636 -37.846,-10.16 -37.592,-10.414 v1(-36.068,-10.414)
  Top Layer w0.4: C8.1@-41.656,-24.13 -41.656,-25.251 -41.571,-25.336 C11.2@-36.322,-25.336 ; C11.2 C11.2@-36.322,-25.463 ; v1(-36.322,-24.257) C11.2@-36.322,-25.336 ; C11.2@-36.195,-25.336 C11.2@-36.322,-25.336 ; v1(-36.068,-10.414) -33.147,-10.414 -30.861,-8.128 v1(-27.178,-8.128) ; -35.433,-25.463 C11.2@-36.322,-25.463 ; C11.2@-36.322,-25.463 C11.2@-36.322,-25.336
  Bottom Layer w0.4: v1(-36.322,-24.257) -36.322,-23.749 -36.068,-23.495 v1(-36.068,-10.414)
  other v1: -27.178,-9.144 -26.162,-9.144 -25.146,-9.144 -26.162,-8.128 -25.146,-8.128 -27.305,-3.048 -26.289,-3.048 -25.273,-3.048 -27.305,-2.032 -26.289,-2.032 -25.273,-2.032
VSA: C12.2 R17.2 U5.4 | length 6
  Top Layer w0.254: U5.4 -42.184,-11.469 -41.148,-10.433 C12.2 -40.535,-10.4 -40.352,-10.217 -40.352,-8.737 -39.883,-8.267 R17.2@-39.883,-8.255

## Polygon pours and split planes (outlines as drawn)
GND on Top Layer "P_GNS_TOP" (solid, remove dead copper, pour order 56): -61.722,3.302 3.302,3.302 3.302,-36.703 -61.722,-36.703
BMA1 on Top Layer "P_BMA1" (solid, remove dead copper, pour order 51): -4.699,-18.796 -3.302,-18.796 -3.302,-20.066 -8.001,-20.066 -8.001,-14.478 -26.797,-14.478 -26.797,-18.669 -27.813,-18.669 -27.813,-13.843 -4.699,-13.843
BMA2 on Top Layer "P_BMA2" (solid, remove dead copper, pour order 50): -8.255,-21.336 -3.302,-21.336 -3.302,-22.606 -10.922,-22.606 -10.922,-15.24 -24.511,-15.24 -24.511,-18.796 -25.146,-18.796 -25.146,-14.605 -8.255,-14.605
BMB1 on Top Layer "P_BMB1" (solid, remove dead copper, pour order 49): -11.43,-23.876 -3.302,-23.876 -3.302,-25.146 -13.589,-25.146 -13.589,-16.002 -21.082,-16.002 -21.082,-18.669 -21.844,-18.669 -21.844,-15.367 -11.43,-15.367
BMB2 on Top Layer "P_BMB2" (solid, remove dead copper, pour order 48): -13.97,-26.289 -3.302,-26.289 -3.302,-27.559 -16.129,-27.559 -16.129,-16.764 -18.542,-16.764 -18.542,-18.669 -19.431,-18.669 -19.431,-16.129 -13.97,-16.129
GND on Top Layer "P_GND_POWER" (solid, remove dead copper, pour order 46): -54.864,-2.667 -51.816,-2.667 -51.816,-1.27 2.159,-1.27 2.159,1.016 -54.864,1.016
VM on Top Layer "P_VM_TOP" (solid, remove dead copper, pour order 45): -17.272,-13.208 -17.272,-7.493 -27.813,-7.493 -27.813,-13.208
VM on Top Layer "P_VM_TOP_1" (solid, remove dead copper, pour order 52): -50.165,-1.524 -50.165,-3.937 -50.23,-3.872 -55.04,-3.872 -55.04,-5.272 -52.182,-8.13 -47.311,-8.13 -47.311,-2.734 -47.244,-2.667 -27.813,-2.667 -27.813,-3.556 -24.638,-3.556 -24.638,-1.524
NetQ4_1 on Top Layer "P_RES1" (solid, remove dead copper, pour order 44): -5.715,-13.208 -6.477,-13.208 -6.477,-10.668 -8.255,-10.668 -8.255,-13.208 -9.017,-13.208 -9.017,-7.239 -4.318,-7.239 -4.318,-9.271 -5.715,-10.668
NetQ2_1 on Top Layer "P_RES2" (solid, remove dead copper, pour order 43): -14.859,-13.208 -14.097,-13.208 -14.097,-10.668 -12.319,-10.668 -12.319,-13.208 -11.43,-13.208 -11.43,-10.668 -10.795,-10.033 -10.16,-10.033 -10.16,-7.112 -14.986,-7.112
GND on Bottom Layer "P_GND_BOTTOM" (solid, remove dead copper, pour order 57): 3.302,3.302 3.302,-36.703 -61.722,-36.703 -61.722,3.302
VM on Bottom Layer "P_VM_BOTTOM" (solid, remove dead copper, pour order 53): -27.813,-9.525 -24.638,-9.525 -24.638,-1.524 -27.813,-1.524
GND on Layer 1 "NONET_L-01_P-001" (solid, remove dead copper, pour order 60): 3.302,3.302 3.302,-36.703 -61.722,-36.703 -61.722,3.302
GND on Layer 2 "NONET_L-01_P-001" (solid, remove dead copper, pour order 61): -61.722,3.302 -61.722,-36.703 3.302,-36.703 3.302,3.302

## Keep-outs
Keep-Out Layer:
  the board outline again, w0.2

## Silkscreen, mask and mechanical layers (free items; w line width, h text height)
Top Overlay:
  drawing of 21 lines, arcs and shapes, not listed
  text "PEAK CURRENT : 6.6A" at -14.224,1.917 h1
  text "TMC2160 Stepper Driver" at -47.602,1.56 h0.8
  text "RMS CURRENT : 4.7A" at -14.224,0.774 h1
  text "10A 50V" at -39.601,0.023 h0.8
  text "GND" at -51.411,-2.464 h1
  text "+V MOTOR" at -51.457,-4.955 h1
  text "DIRECTION" at -24.956,-20.068 h1
  text "SW4" at -24.741,-21.133 h1
  text "HOLD CURRENT" at -25.019,-22.862 h1
  text "SW1" at -24.741,-23.927 h1
  text "Reduction" at -21.59,-23.927 h1
  text "50%" at -19.558,-24.866 h1
  text "ON" at -24.741,-24.943 h1
  text "0%" at -19.431,-25.755 h1
  text "OFF" at -24.741,-25.959 h1
  text "DIAG1" at -47.193,-26.392 h1 r90
  text "SW5" at -32.996,-27.991 h1
  text "OFF" at -29.529,-27.991 h1
  text "ON" at -26.608,-27.991 h1
  text "OFF" at -23.687,-27.991 h1
  text "ON" at -20.765,-27.991 h1
  text "PUL" at -55.085,-28.898 h0.8
  text "SW6" at -32.996,-29.134 h1
  text "OFF" at -29.529,-29.134 h1
  text "OFF" at -26.608,-29.134 h1
  text "ON" at -23.687,-29.134 h1
  text "ON" at -20.765,-29.134 h1
  text "8" at -28.678,-30.135 h1.2
  text "16" at -26.138,-30.135 h1.2
  text "32" at -23.344,-30.135 h1.2
  text "64" at -20.169,-30.135 h1.2
  text "DIR" at -55.085,-30.148 h0.8
  text "uSTEP" at -33.25,-30.404 h1 r90
  text "EN" at -55.085,-31.398 h0.8
  text "SW7" at -44.68,-32.055 h1
  text "OFF" at -41.213,-32.055 h1
  text "ON" at -38.292,-32.055 h1
  text "OFF" at -35.371,-32.055 h1
  text "ON" at -32.449,-32.055 h1
  text "OFF" at -29.528,-32.055 h1
  text "ON" at -26.607,-32.055 h1
  text "OFF" at -23.686,-32.055 h1
  text "ON" at -20.765,-32.055 h1
  text "CHOPPER" at -17.756,-32.311 h1
  text "GND" at -54.968,-32.616 h0.8
  text "SW8" at -44.68,-33.198 h1
  text "OFF" at -41.213,-33.198 h1
  text "OFF" at -38.292,-33.198 h1
  text "ON" at -35.371,-33.198 h1
  text "ON" at -32.449,-33.198 h1
  text "OFF" at -29.528,-33.198 h1
  text "OFF" at -26.607,-33.198 h1
  text "ON" at -23.686,-33.198 h1
  text "ON" at -20.765,-33.198 h1
  text "SW2" at -17.478,-33.376 h1
  text "MODE" at -14.327,-33.376 h1
  text "StealthChop" at -14.327,-34.29 h1
  text "SW3" at -44.68,-34.341 h1
  text "OFF" at -41.213,-34.341 h1
  text "OFF" at -38.292,-34.341 h1
  text "OFF" at -35.371,-34.341 h1
  text "OFF" at -32.449,-34.341 h1
  text "ON" at -29.528,-34.341 h1
  text "ON" at -26.607,-34.341 h1
  text "ON" at -23.686,-34.341 h1
  text "ON" at -20.765,-34.341 h1
  text "ON" at -17.478,-34.392 h1
  text "SpreadCycle" at -14.327,-35.295 h1
  text "%" at -43.918,-35.326 h1.2
  text "OFF" at -17.478,-35.408 h1
  text "50" at -40.832,-35.466 h1.5
  text "60" at -37.911,-35.466 h1.5
  text "65" at -34.99,-35.466 h1.5
  text "70" at -32.068,-35.466 h1.5
  text "80" at -29.147,-35.466 h1.5
  text "85" at -26.226,-35.466 h1.5
  text "90" at -23.305,-35.466 h1.5
  text "100" at -20.804,-35.466 h1.5
  text "CURRENT" at -44.934,-35.738 h1 r90